# EAGLE board 3PDT Board Panelized (EAGLE 9.5.2)
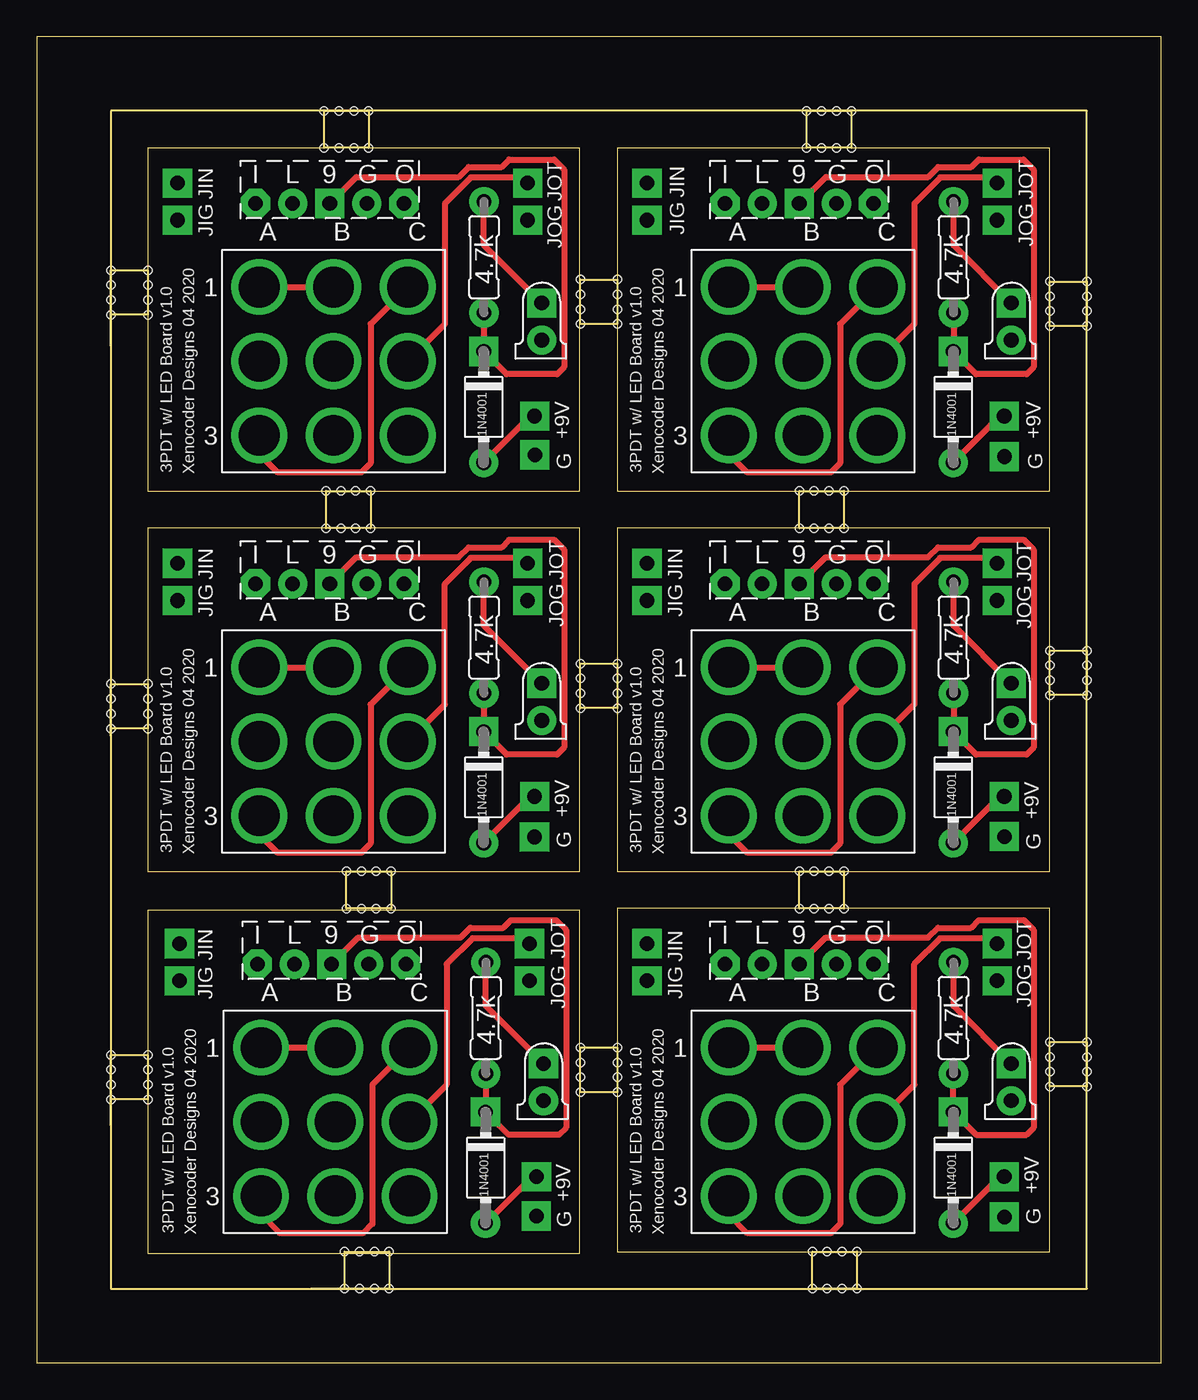
[diagram p0: board, top side]
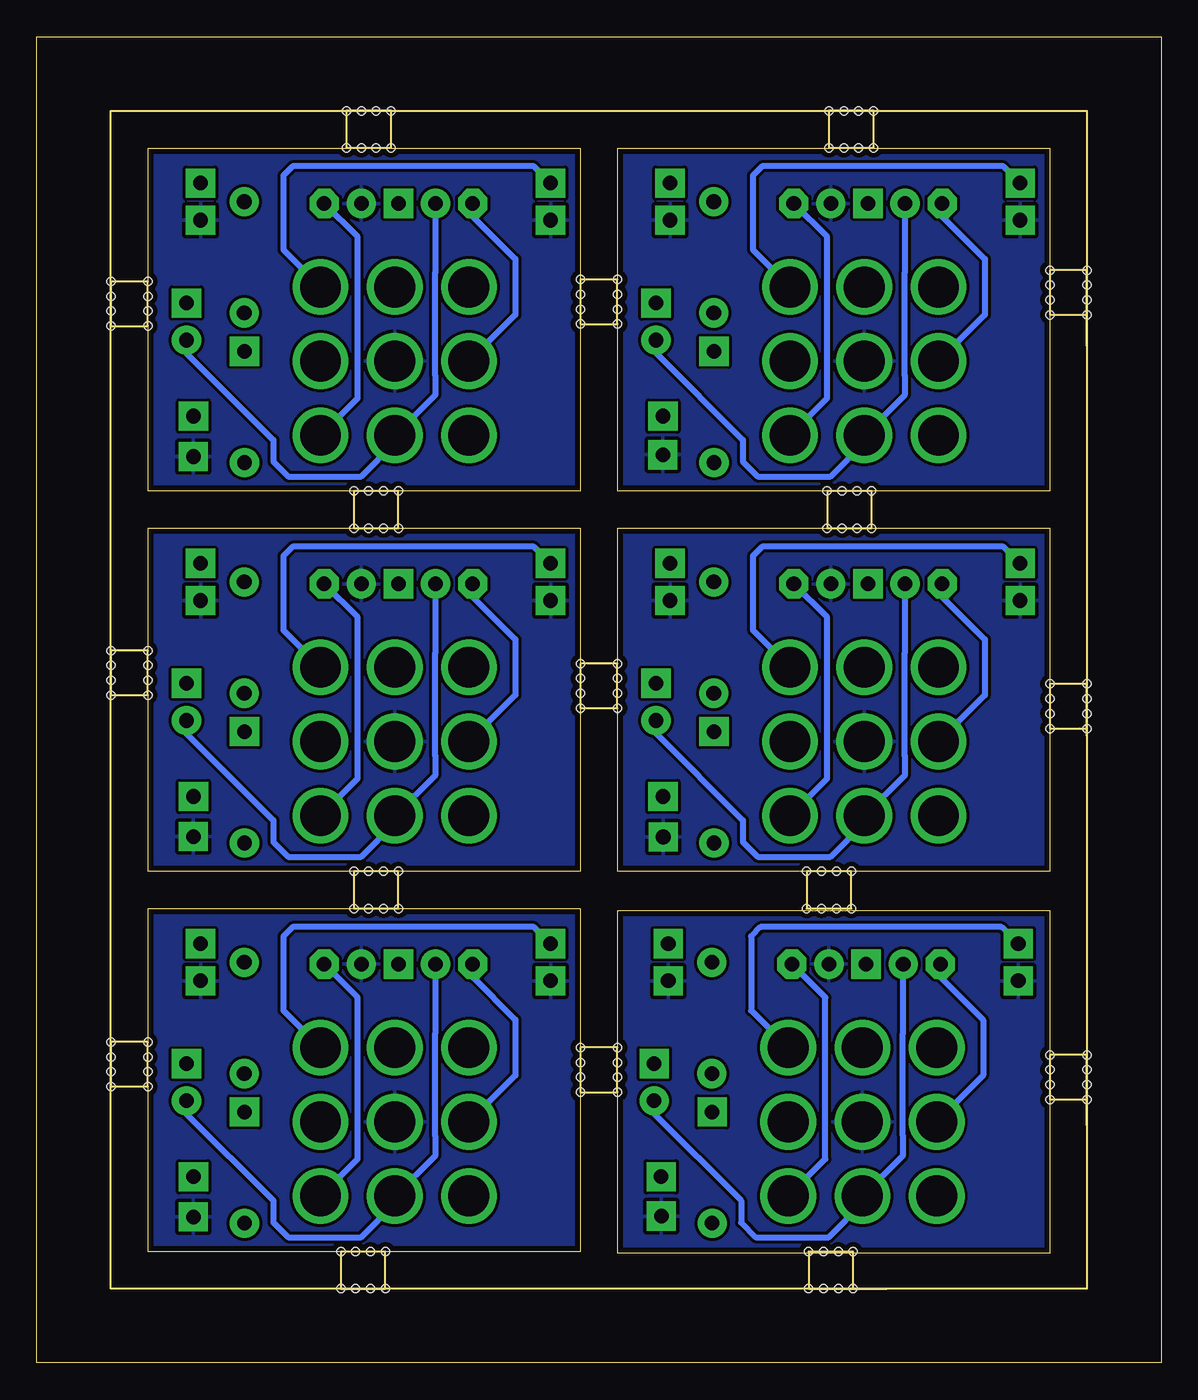
[diagram p1: board, bottom side, seen from below]

Size 76.96 x 90.81 mm. Coordinates in mm from the lower left corner, seen from the top.
Outline: 5.08,16.26 5.08,19.3
Outline: 5.08,42.93 5.08,45.97
Outline: 5.08,69.6 5.08,72.64
Outline: 21.84,5.08 18.8,5.08
Outline: 0,0 76.96,0 76.96,90.81 0,90.81 0,0
Outline: 5.08,5.08 71.88,5.08 71.88,85.72 5.08,85.72 5.08,5.08
Outline: 5.08,46.48 7.62,46.48 7.62,43.43 5.08,43.43 5.08,46.48
Outline: 5.08,21.08 7.62,21.08 7.62,18.03 5.08,18.03 5.08,21.08
Outline: 21.08,5.08 21.08,7.62 24.13,7.62 24.13,5.08 21.08,5.08
Outline: 37.21,21.59 39.75,21.59 39.75,18.54 37.21,18.54 37.21,21.59
Outline: 53.09,5.08 53.09,7.62 56.13,7.62 56.13,5.08 53.09,5.08
Outline: 21.21,31.11 21.21,33.66 24.26,33.66 24.26,31.11 21.21,31.11
Outline: 7.62,7.49 37.19,7.49 37.19,30.98 7.62,30.98 7.62,7.49
Outline: 39.75,7.62 69.32,7.62 69.32,31.11 39.75,31.11 39.75,7.62
Outline: 69.34,74.04 71.88,74.04 71.88,70.99 69.34,70.99 69.34,74.04
Outline: 71.88,18.92 69.34,18.92 69.34,21.97 71.88,21.97 71.88,18.92
Outline: 55.24,33.66 55.24,31.11 52.2,31.11 52.2,33.66 55.24,33.66
Outline: 7.62,33.66 37.19,33.66 37.19,57.14 7.62,57.14 7.62,33.66
Outline: 39.75,44.83 37.21,44.83 37.21,47.88 39.75,47.88 39.75,44.83
Outline: 39.75,33.66 69.32,33.66 69.32,57.14 39.75,57.14 39.75,33.66
Outline: 71.88,45.72 69.34,45.72 69.34,48.77 71.88,48.77 71.88,45.72
Outline: 22.86,59.69 22.86,57.15 19.81,57.15 19.81,59.69 22.86,59.69
Outline: 55.24,59.69 55.24,57.15 52.2,57.15 52.2,59.69 55.24,59.69
Outline: 5.08,74.8 7.62,74.8 7.62,71.75 5.08,71.75 5.08,74.8
Outline: 7.62,59.69 37.19,59.69 37.19,83.17 7.62,83.17 7.62,59.69
Outline: 22.73,85.72 22.73,83.19 19.68,83.19 19.68,85.72 22.73,85.72
Outline: 37.21,74.17 39.75,74.17 39.75,71.12 37.21,71.12 37.21,74.17
Outline: 39.75,59.69 69.32,59.69 69.32,83.17 39.75,83.17 39.75,59.69
Outline: 55.75,85.72 55.75,83.19 52.7,83.19 52.7,85.72 55.75,85.72
Copper layers (1*16): Top 0.035559375mm / dielectric 1.6mm / Bottom 0.035559375mm
Design rules "oshpark-2layer": minimum track width 6mil, minimum drill 10mil, track to track 6mil, track to pad 6mil, pad to pad 6mil, via to via 6mil, smd to smd 6mil, copper to edge 15mil, drill to drill 6mil, minimum pad ring 5mil, minimum via ring 5mil, stop-mask expansion 2.5mil, vias tented up to drill 0mil, thermal gap 10mil
Net classes: 0 default: clearance 0.205 mm
Holes 0.55 mm at 5.08,46.48 5.08,45.47 5.08,44.45 5.08,43.43 7.62,46.48 7.62,45.47 7.62,44.45 7.62,43.43 5.08,21.08 5.08,20.07 5.08,19.05 5.08,18.03 7.62,21.08 7.62,20.07 7.62,19.05 7.62,18.03 21.08,5.08 22.1,5.08 23.11,5.08 24.13,5.08 21.08,7.62 22.1,7.62 23.11,7.62 24.13,7.62 37.21,21.59 37.21,20.57 37.21,19.56 37.21,18.54 39.75,21.59 39.75,20.57 39.75,19.56 39.75,18.54 53.09,5.08 54.1,5.08 55.12,5.08 56.13,5.08 53.09,7.62 54.1,7.62 55.12,7.62 56.13,7.62 21.21,31.11 22.23,31.11 23.24,31.11 24.26,31.11 21.21,33.66 22.23,33.66 23.24,33.66 24.26,33.66 69.34,74.04 69.34,73.03 69.34,72.01 69.34,70.99 71.88,74.04 71.88,73.03 71.88,72.01 71.88,70.99 71.88,18.92 71.88,19.94 71.88,20.95 71.88,21.97 69.34,18.92 69.34,19.94 69.34,20.95 69.34,21.97 55.24,33.66 54.23,33.66 53.21,33.66 52.2,33.66 55.24,31.11 54.23,31.11 53.21,31.11 52.2,31.11 39.75,44.83 39.75,45.85 39.75,46.86 39.75,47.88 37.21,44.83 37.21,45.85 37.21,46.86 37.21,47.88 71.88,45.72 71.88,46.74 71.88,47.75 71.88,48.77 69.34,45.72 69.34,46.74 69.34,47.75 69.34,48.77 22.86,59.69 21.84,59.69 20.83,59.69 19.81,59.69 22.86,57.15 21.84,57.15 20.83,57.15 19.81,57.15 55.24,59.69 54.23,59.69 53.21,59.69 52.2,59.69 55.24,57.15 54.23,57.15 53.21,57.15 52.2,57.15 5.08,74.8 5.08,73.79 5.08,72.77 5.08,71.75 7.62,74.8 7.62,73.79 7.62,72.77 7.62,71.75 22.73,85.72 21.72,85.72 20.7,85.72 19.68,85.72 22.73,83.19 21.72,83.19 20.7,83.19 19.68,83.19 37.21,74.17 37.21,73.15 37.21,72.14 37.21,71.12 39.75,74.17 39.75,73.15 39.75,72.14 39.75,71.12 55.75,85.72 54.74,85.72 53.72,85.72 52.7,85.72 55.75,83.19 54.74,83.19 53.72,83.19 52.7,83.19

## Footprints (pad centres in the part's own frame; a part is rotated, then mirrored left to right if it is on the bottom)
SQUARE = drill 1 pad 2 square: 1 0,0
DO41-3 = drill 1 pad 2: A 3.81,0 | drill 1 pad 2 square: C -3.81,0
LED3MM = drill 1 pad 2 square: A -1.27,0 | drill 1 pad 2: K 1.27,0
R0207/3 = drill 1 pad 2: 1 -3.81,0; 2 3.81,0
3PDT = drill 2.8 pad 2: A1 -5.08,5.08; A2 -5.08,0; A3 -5.08,-5.08; B1 0,5.08; B2 0,0; B3 0,-5.08; C1 5.08,5.08; C2 5.08,0; C3 5.08,-5.08
BOARDLINK = drill 1 pad 2 octagon: 1 -2.54,0; 5 7.62,0 | drill 1 pad 2: 2 0,0; 4 5.08,0 | drill 1 pad 2 square: 3 2.54,0

## Placement (x,y rotation side)
+9V  +9V(T)  [SQUARE]  34.22,12.75 0 top
+9V1  +9V(T)  [SQUARE]  66.22,12.75 0 top
+9V2  +9V(T)  [SQUARE]  34.09,38.78 0 top
+9V3  +9V(T)  [SQUARE]  66.22,38.78 0 top
+9V4  +9V(T)  [SQUARE]  34.09,64.82 0 top
+9V5  +9V(T)  [SQUARE]  66.22,64.82 0 top
D1  1N4001  [DO41-3]  30.73,13.38 270 top
D2  LED3MM  [LED3MM]  34.7,19.22 270 top
D3  1N4001  [DO41-3]  62.73,13.38 270 top
D4  LED3MM  [LED3MM]  66.7,19.22 270 top
D5  1N4001  [DO41-3]  30.6,39.41 270 top
D6  LED3MM  [LED3MM]  34.57,45.26 270 top
D7  1N4001  [DO41-3]  62.73,39.41 270 top
D8  LED3MM  [LED3MM]  66.7,45.26 270 top
D9  1N4001  [DO41-3]  30.6,65.45 270 top
D10  LED3MM  [LED3MM]  34.57,71.29 270 top
D11  1N4001  [DO41-3]  62.73,65.45 270 top
D12  LED3MM  [LED3MM]  66.7,71.29 270 top
G  GND(T)  [SQUARE]  34.2,10.05 0 top
G1  G  [SQUARE]  66.23,10 0 top
G2  GND(T)  [SQUARE]  34.08,36.01 0 top
G3  GND(T)  [SQUARE]  66.23,36.04 0 top
G4  GND(T)  [SQUARE]  34.1,62.17 0 top
G5  GND(T)  [SQUARE]  66.23,62.05 0 top
JIG  GND(T)  [SQUARE]  9.78,26.16 0 top
JIG1  GND(T)  [SQUARE]  41.78,26.16 0 top
JIG2  GND(T)  [SQUARE]  9.65,52.2 0 top
JIG3  GND(T)  [SQUARE]  41.78,52.2 0 top
JIG4  GND(T)  [SQUARE]  9.65,78.23 0 top
JIG5  GND(T)  [SQUARE]  41.78,78.23 0 top
JIN  [SQUARE]  9.78,28.7 0 top
JIN1  [SQUARE]  41.78,28.7 0 top
JIN2  [SQUARE]  9.65,54.74 0 top
JIN3  [SQUARE]  41.78,54.74 0 top
JIN4  [SQUARE]  9.65,80.77 0 top
JIN5  [SQUARE]  41.78,80.77 0 top
JOG  GND(T)  [SQUARE]  33.73,26.16 0 top
JOG1  GND(T)  [SQUARE]  65.74,26.16 0 top
JOG2  GND(T)  [SQUARE]  33.61,52.2 0 top
JOG3  GND(T)  [SQUARE]  65.74,52.2 0 top
JOG4  GND(T)  [SQUARE]  33.61,78.23 0 top
JOG5  GND(T)  [SQUARE]  65.74,78.23 0 top
JOT  [SQUARE]  33.73,28.7 0 top
JOT1  [SQUARE]  65.74,28.7 0 top
JOT2  [SQUARE]  33.61,54.74 0 top
JOT3  [SQUARE]  65.74,54.74 0 top
JOT4  [SQUARE]  33.61,80.77 0 top
JOT5  [SQUARE]  65.74,80.77 0 top
R1  4.7k  [R0207/3]  30.75,23.62 270 top
R2  4.7k  [R0207/3]  62.75,23.62 270 top
R3  4.7k  [R0207/3]  30.62,49.66 270 top
R4  4.7k  [R0207/3]  62.75,49.66 270 top
R5  4.7k  [R0207/3]  30.62,75.69 270 top
R6  4.7k  [R0207/3]  62.75,75.69 270 top
SW1  3PDT  [3PDT]  52.45,16.51 0 top
SW2  3PDT  [3PDT]  20.45,16.51 0 top
SW3  3PDT  [3PDT]  20.32,42.55 0 top
SW4  3PDT  [3PDT]  52.45,42.55 0 top
SW5  3PDT  [3PDT]  20.32,68.58 0 top
SW6  3PDT  [3PDT]  52.45,68.58 0 top
U$1  BOARDLINK  [BOARDLINK]  17.65,27.3 0 top
U$2  BOARDLINK  [BOARDLINK]  49.66,27.3 0 top
U$3  BOARDLINK  [BOARDLINK]  17.53,53.34 0 top
U$4  BOARDLINK  [BOARDLINK]  49.66,53.34 0 top
U$5  BOARDLINK  [BOARDLINK]  17.53,79.38 0 top
U$6  BOARDLINK  [BOARDLINK]  49.66,79.38 0 top

## Library data of the parts
+9V +9V1-+9V5 G G1-G5 JIG JIG1-JIG5 JIN JIN1-JIN5 JOG JOG1-JOG5 JOT JOT1-JOT5 = mb_supply
D1-D12 = mb_diodes
R1-R6 = mb_resistors
SW1-SW6 = mb_switches
U$1-U$6 = xc_library

## Nets
+9V: +9V.1 D1.A
+9V1: +9V1.1 D3.A
+9V2: +9V2.1 D5.A
+9V3: +9V3.1 D7.A
+9V4: +9V4.1 D9.A
+9V5: +9V5.1 D11.A
A: D1.C R1.2 U$1.3
A1: D3.C R2.2 U$2.3
A2: D5.C R3.2 U$3.3
A3: D7.C R4.2 U$4.3
A4: D9.C R5.2 U$5.3
A5: D11.C R6.2 U$6.3
B: D2.K SW2.B3 U$1.2
B1: D4.K SW1.B3 U$2.2
B2: D6.K SW3.B3 U$3.2
B3: D8.K SW4.B3 U$4.2
B4: D10.K SW5.B3 U$5.2
B5: D12.K SW6.B3 U$6.2
GND: G.1 JIG.1 JOG.1 SW2.B2 U$1.4
GND1: G1.1 JIG1.1 JOG1.1 SW1.B2 U$2.4
GND2: G2.1 JIG2.1 JOG2.1 SW3.B2 U$3.4
GND3: G3.1 JIG3.1 JOG3.1 SW4.B2 U$4.4
GND4: G4.1 JIG4.1 JOG4.1 SW5.B2 U$5.4
GND5: G5.1 JIG5.1 JOG5.1 SW6.B2 U$6.4
N$1: JOT1.1 SW1.C2
N$2: JOT.1 SW2.C2
N$3: SW2.A1 SW2.B1
N$4: JIN.1 SW2.A3 SW2.C1
N$5: SW2.A2 U$1.1
N$6: SW2.C3 U$1.5
N$7: D2.A R1.1
N$8: JIN1.1 SW1.A3 SW1.C1
N$9: SW1.A1 SW1.B1
N$10: SW1.A2 U$2.1
N$11: SW1.C3 U$2.5
N$12: D4.A R2.1
N$13: JOT2.1 SW3.C2
N$14: JIN2.1 SW3.A3 SW3.C1
N$15: SW3.A1 SW3.B1
N$16: SW3.A2 U$3.1
N$17: SW3.C3 U$3.5
N$18: D6.A R3.1
N$19: JOT3.1 SW4.C2
N$20: JIN3.1 SW4.A3 SW4.C1
N$21: SW4.A1 SW4.B1
N$22: SW4.A2 U$4.1
N$23: SW4.C3 U$4.5
N$24: D8.A R4.1
N$25: JOT4.1 SW5.C2
N$26: JIN4.1 SW5.A3 SW5.C1
N$27: SW5.A1 SW5.B1
N$28: SW5.A2 U$5.1
N$29: SW5.C3 U$5.5
N$30: D10.A R5.1
N$31: JOT5.1 SW6.C2
N$32: JIN5.1 SW6.A3 SW6.C1
N$33: SW6.A1 SW6.B1
N$34: SW6.A2 U$6.1
N$35: SW6.C3 U$6.5
N$36: D12.A R6.1

## Tracks (layer width: path | path; a pad name or v marks a point on that pad's centre or on a via)
+9V
  Top 0.406: +9V.1 33.91,12.75 D1.A
+9V1
  Top 0.406: D3.A 65.92,12.75 +9V1.1
+9V2
  Top 0.406: D5.A 33.78,38.78 +9V2.1
+9V3
  Top 0.406: +9V3.1 65.92,38.78 D7.A
+9V4
  Top 0.406: +9V4.1 33.78,64.82 D9.A
+9V5
  Top 0.406: +9V5.1 65.92,64.82 D11.A
A
  Top 0.406: U$1.3 22.01,29.12 29.02,29.12 29.69,29.79 31.95,29.79 32.48,30.32 35.55,30.32 36.23,29.63 36.23,16.11 35.75,15.62 32.3,15.62 D1.C 30.75,17.2 R1.2
A1
  Top 0.406: U$2.3 54.01,29.12 61.02,29.12 61.69,29.79 63.95,29.79 64.48,30.32 67.55,30.32 68.24,29.63 68.24,16.11 67.75,15.62 64.3,15.62 D3.C 62.73,19.79 R2.2
A2
  Top 0.406: R3.2 30.62,43.24 D5.C 32.17,41.66 35.62,41.66 36.11,42.14 36.11,55.67 35.42,56.35 32.35,56.35 31.82,55.83 29.56,55.83 28.89,55.16 21.88,55.16 U$3.3
A3
  Top 0.406: R4.2 62.75,43.24 D7.C 64.3,41.66 67.75,41.66 68.24,42.14 68.24,55.67 67.55,56.35 64.48,56.35 63.95,55.83 61.69,55.83 61.02,55.16 54.01,55.16 U$4.3
A4
  Top 0.406: U$5.3 21.88,81.19 28.89,81.19 29.56,81.86 31.82,81.86 32.35,82.39 35.42,82.39 36.11,81.7 36.11,68.18 35.62,67.69 32.17,67.69 D9.C 30.62,69.28 R5.2
A5
  Top 0.406: U$6.3 54.01,81.19 61.02,81.19 61.69,81.86 63.95,81.86 64.48,82.39 67.55,82.39 68.24,81.7 68.24,68.18 67.75,67.69 64.3,67.69 D11.C 62.75,69.28 R6.2
B
  Bottom 0.406: U$1.2 17.65,22.58 17.68,22.55 17.68,15.55 17.65,15.52 17.65,14.22 SW2.B3 20.45,10.92 22.75,8.62 27.75,8.62 28.75,9.62 28.75,11.12 34.7,17.07 D2.K
B1
  Bottom 0.406: U$2.2 49.66,22.58 49.69,22.55 49.69,15.55 49.66,15.52 49.66,14.22 SW1.B3 52.45,10.92 54.75,8.62 59.75,8.62 60.75,9.62 60.75,11.12 66.7,17.07 D4.K
B2
  Bottom 0.406: U$3.2 17.53,48.62 17.56,48.58 17.56,41.59 17.53,41.55 17.53,40.26 SW3.B3 20.32,36.95 22.62,34.66 27.62,34.66 28.62,35.66 28.62,37.16 34.57,43.1 D6.K
B3
  Bottom 0.406: U$4.2 49.66,48.62 49.69,48.58 49.69,41.59 49.66,41.55 49.66,40.26 SW4.B3 52.45,36.95 54.75,34.66 59.75,34.66 60.75,35.66 60.75,37.16 66.7,43.1 D8.K
B4
  Bottom 0.406: U$5.2 17.53,74.65 17.56,74.62 17.56,67.62 17.53,67.59 17.53,66.29 SW5.B3 20.32,62.99 22.62,60.69 27.62,60.69 28.62,61.69 28.62,63.19 34.57,69.14 D10.K
B5
  Bottom 0.406: U$6.2 49.66,74.65 49.69,74.62 49.69,67.62 49.66,67.59 49.66,66.29 SW6.B3 52.45,62.99 54.75,60.69 59.75,60.69 60.75,61.69 60.75,63.19 66.7,69.14 D12.K
GND
  pour Bottom: 7.62,31.11 7.62,7.62 37.52,7.62 37.52,31.11
GND1
  pour Bottom: 39.75,31.11 39.75,7.62 69.52,7.62 69.52,31.11
GND2
  pour Bottom: 7.62,57.15 7.62,33.66 37.39,33.66 37.39,57.15
GND3
  pour Bottom: 39.75,57.15 39.75,33.66 69.52,33.66 69.52,57.15
GND4
  pour Bottom: 7.62,83.19 7.62,59.69 37.39,59.69 37.39,83.19
GND5
  pour Bottom: 39.75,83.19 39.75,59.69 69.52,59.69 69.52,83.19
N$1
  Top 0.406: JOT1.1 65.36,29.07 61.84,29.07 60.07,27.3 60.07,19.05 SW1.C2
N$2
  Top 0.406: JOT.1 33.36,29.07 29.84,29.07 28.07,27.3 28.07,19.05 SW2.C2
N$3
  Top 0.406: SW2.A1 SW2.B1
N$4
  Top 0.406: SW2.A3 15.37,10.16 16.64,8.89 22.35,8.89 22.99,9.53 22.99,19.05 SW2.C1
  Bottom 0.406: JIN.1 10.92,29.84 27.43,29.84 28.07,29.21 28.07,24.13 SW2.C1
N$5
  Bottom 0.406: U$1.1 15.11,26.42 12.19,23.5 12.19,19.68 SW2.A2
N$6
  Bottom 0.406: SW2.C3 22.99,13.97 22.99,25.02 U$1.5
N$7
  Top 0.406: D2.A 30.75,24.44 R1.1
N$8
  Top 0.406: SW1.C1 54.99,19.05 54.99,9.53 54.36,8.89 48.64,8.89 47.37,10.16 SW1.A3
  Bottom 0.406: JIN1.1 42.93,29.84 59.44,29.84 60.07,29.21 60.07,24.13 SW1.C1
N$9
  Top 0.406: SW1.A1 SW1.B1
N$10
  Bottom 0.406: U$2.1 47.12,26.42 44.2,23.5 44.2,19.68 SW1.A2
N$11
  Bottom 0.406: SW1.C3 54.99,13.97 54.99,25.02 U$2.5
N$12
  Top 0.406: D4.A 62.75,24.44 R2.1
N$13
  Top 0.406: JOT2.1 33.23,55.11 29.71,55.11 27.94,53.34 27.94,45.09 SW3.C2
N$14
  Top 0.406: SW3.C1 22.86,45.09 22.86,35.56 22.23,34.92 16.51,34.92 15.24,36.2 SW3.A3
  Bottom 0.406: JIN2.1 10.79,55.88 27.3,55.88 27.94,55.24 27.94,50.16 SW3.C1
N$15
  Top 0.406: SW3.A1 SW3.B1
N$16
  Bottom 0.406: U$3.1 14.99,52.45 12.06,49.53 12.06,45.72 SW3.A2
N$17
  Bottom 0.406: SW3.C3 22.86,40.01 22.86,51.05 U$3.5
N$18
  Top 0.406: D6.A 30.62,50.48 R3.1
N$19
  Top 0.406: SW4.C2 60.07,45.09 60.07,53.34 61.84,55.11 65.36,55.11 JOT3.1
N$20
  Top 0.406: SW4.A3 47.37,36.2 48.64,34.92 54.36,34.92 54.99,35.56 54.99,45.09 SW4.C1
  Bottom 0.406: JIN3.1 42.93,55.88 59.44,55.88 60.07,55.24 60.07,50.16 SW4.C1
N$21
  Top 0.406: SW4.A1 SW4.B1
N$22
  Bottom 0.406: U$4.1 47.12,52.45 44.2,49.53 44.2,45.72 SW4.A2
N$23
  Bottom 0.406: SW4.C3 54.99,40.01 54.99,51.05 U$4.5
N$24
  Top 0.406: D8.A 62.75,50.48 R4.1
N$25
  Top 0.406: JOT4.1 33.23,81.14 29.71,81.14 27.94,79.38 27.94,71.12 SW5.C2
N$26
  Top 0.406: SW5.A3 15.24,62.23 16.51,60.96 22.23,60.96 22.86,61.59 22.86,71.12 SW5.C1
  Bottom 0.406: JIN4.1 10.79,81.92 27.3,81.92 27.94,81.28 27.94,76.2 SW5.C1
N$27
  Top 0.406: SW5.A1 SW5.B1
N$28
  Bottom 0.406: U$5.1 14.99,78.49 12.06,75.56 12.06,71.75 SW5.A2
N$29
  Bottom 0.406: SW5.C3 22.86,66.04 22.86,77.09 U$5.5
N$30
  Top 0.406: D10.A 30.62,76.51 R5.1
N$31
  Top 0.406: JOT5.1 65.36,81.14 61.84,81.14 60.07,79.38 60.07,71.12 SW6.C2
N$32
  Top 0.406: SW6.A3 47.37,62.23 48.64,60.96 54.36,60.96 54.99,61.59 54.99,71.12 SW6.C1
  Bottom 0.406: JIN5.1 42.93,81.92 59.44,81.92 60.07,81.28 60.07,76.2 SW6.C1
N$33
  Top 0.406: SW6.A1 SW6.B1
N$34
  Bottom 0.406: U$6.1 47.12,78.49 44.2,75.56 44.2,71.75 SW6.A2
N$35
  Bottom 0.406: SW6.C3 54.99,66.04 54.99,77.09 U$6.5
N$36
  Top 0.406: D12.A 62.75,76.51 R6.1

## Text on the board
tNames: JIN | JOT | JIN | JOT | JIG | JIG | JOG | JOG | +9V | +9V | 3PDT w/ LED Board v1.0 | Xenocoder Designs 04 2020 | G | 3PDT w/ LED Board v1.0 | Xenocoder Designs 04 2020 | G | JIN | JOT | JIN | JOT | JIG | JIG | JOG | JOG | +9V | +9V | 3PDT w/ LED Board v1.0 | Xenocoder Designs 04 2020 | G | 3PDT w/ LED Board v1.0 | Xenocoder Designs 04 2020 | G | JOT | JIN | JIG | JOG | +9V | 3PDT w/ LED Board v1.0 | Xenocoder Designs 04 2020 | 3PDT w/ LED Board v1.0 | Xenocoder Designs 04 2020 | G